# EAGLE board lightning-detector (EAGLE 5.07)
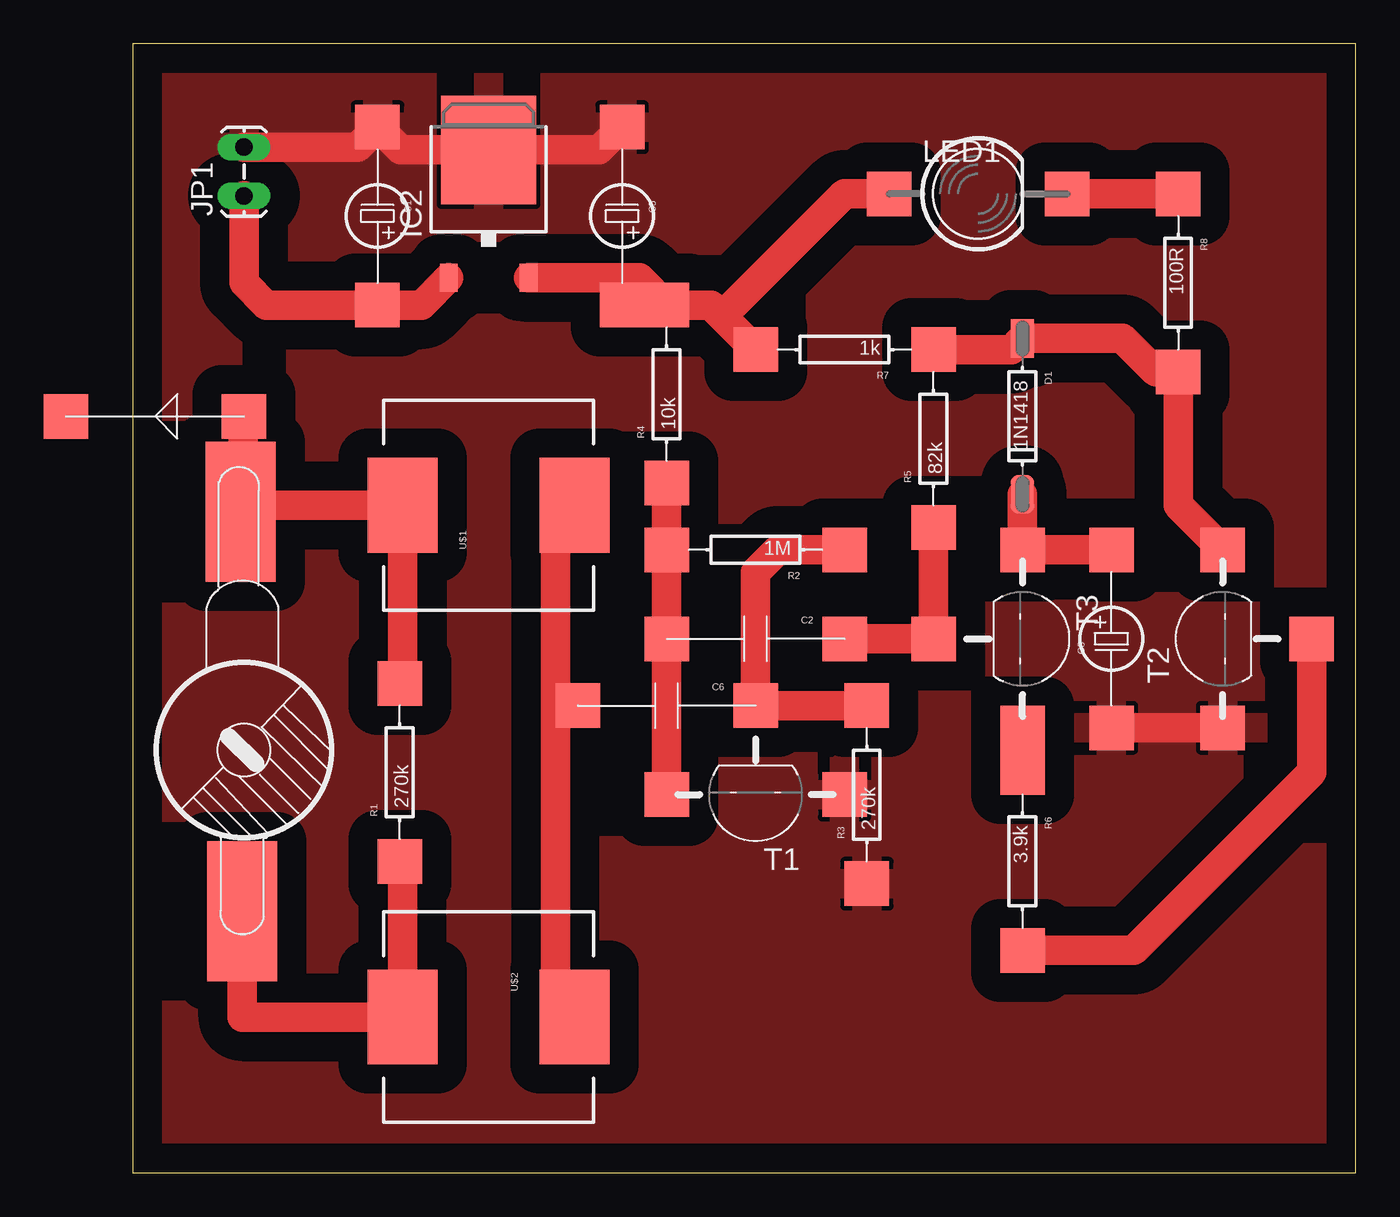
[diagram p0: board, top side]

Size 69.83 x 64.44 mm. Coordinates in mm from the lower left corner, seen from the top.
Outline: 0,0 69.83,0 69.83,64.44 0,64.44 0,0
Copper layers (1*16): Top 0.035mm / dielectric 1.5mm / Bottom 0.035mm
Design rules "default": minimum track width 10mil, minimum drill 24mil, track to track 8mil, track to pad 8mil, pad to pad 8mil, via to via 8mil, smd to smd 8mil, copper to edge 40mil, drill to drill 8mil, minimum pad ring 10mil, minimum via ring 8mil, stop-mask expansion 4mil, vias tented up to drill 0mil, thermal gap 10mil

## Footprints (pad centres in the part's own frame; a part is rotated, then mirrored left to right if it is on the bottom)
CPOL-SMD-10UF-25V = smd 2.54 x 2.54: + 5.08,0; - -5.08,0
CAP-SMD-SMALL = smd 2.54 x 2.54: P$1 5.08,0; P$2 -5.08,0
CERMIT-DIE-10MM = smd 8 x 4: P$1 -9.2,0.1; P$2 13.6,0.2
DIODE-IN4148-SMD = smd 2.184 x 1.321: A -4.445,0; C 4.445,0
TO252 = smd 1 x 1.6: 1 -2.28,-4.8; 2 2.28,-4.8 | smd 5.4 x 6.2: 3 0,2.5
1X02_LOCK_LONGPADS = drill 1.016 long: 1 -0.127,0; 2 2.667,0
LED-RF = smd 2.54 x 2.54: A -5.08,0; K 5.08,0
AXIAL-0.3-SMD = smd 2.54 x 2.54: P$1 -5.08,0; P$2 5.08,0
TO92-EBC-SMD = smd 2.54 x 2.54: B 0,-5.08; C 5.08,0; E -5.08,0
CDRH125 = smd 5.4 x 4: 1 0,4.9; 2 0,-4.9
ANT-WISP-2PAD = smd 2.54 x 2.54: P$3 -5.08,0; P$4 5.08,0

## Placement (x,y rotation side)
C1  10u  [CPOL-SMD-10UF-25V]  13.97,54.61 270 top
C2  [CAP-SMD-SMALL]  35.56,30.48 180 top
C3  10uF  [CPOL-SMD-10UF-25V]  55.88,30.48 90 top
C4  5-20p  [CERMIT-DIE-10MM]  6.35,24.13 90 top
C5  10u  [CPOL-SMD-10UF-25V]  27.94,54.61 270 top
C6  [CAP-SMD-SMALL]  30.48,26.67 180 top
D1  1N1418  [DIODE-IN4148-SMD]  50.8,43.18 270 top
IC2  7805DT  [TO252]  20.32,55.88 0 top
JP1  [1X02_LOCK_LONGPADS]  6.35,55.88 90 top
LED1  [LED-RF]  48.26,55.88 0 top
R1  270k  [AXIAL-0.3-SMD]  15.24,22.86 90 top
R2  1M  [AXIAL-0.3-SMD]  35.56,35.56 180 top
R3  270k  [AXIAL-0.3-SMD]  41.91,21.59 90 top
R4  10k  [AXIAL-0.3-SMD]  30.48,44.45 90 top
R5  82k  [AXIAL-0.3-SMD]  45.72,41.91 90 top
R6  3.9k  [AXIAL-0.3-SMD]  50.8,17.78 270 top
R7  1k  [AXIAL-0.3-SMD]  40.64,46.99 180 top
R8  100R  [AXIAL-0.3-SMD]  59.69,50.8 270 top
T1  9014  [TO92-EBC-SMD]  35.56,21.59 180 top
T2  9014  [TO92-EBC-SMD]  62.23,30.48 90 top
T3  9015  [TO92-EBC-SMD]  50.8,30.48 270 top
U$1  10mH  [CDRH125]  20.32,38.1 90 top
U$2  1mH  [CDRH125]  20.32,8.89 270 top
U$3  ANTENNA-WISP2  [ANT-WISP-2PAD]  1.27,43.18 0 top

## Library data of the parts
C1-C3 C5 C6 D1 JP1 LED1 R1-R8 T1-T3 U$1 U$2 = digital-toy
C4 U$3 = dtoy-RF
IC2 = linear

## Nets
+VIN: C1.+ IC2.1 JP1.1
GND: C1.- C3.- C5.- IC2.3 JP1.2 R3.P$1 T1.E T2.E
N$1: C6.P$2 R2.P$1 R3.P$2 T1.B
N$2: C4.P$2 R1.P$2 U$1.1 U$3.P$3 U$3.P$4
N$3: C6.P$1 U$1.2 U$2.1
N$4: C2.P$1 R2.P$2 R4.P$1 T1.C
N$5: C2.P$2 R5.P$1 T3.B
N$6: D1.A R5.P$2 R7.P$1 R8.P$2 T2.C
N$7: C3.+ D1.C T3.E
N$8: R6.P$1 T3.C
N$9: R6.P$2 T2.B
N$12: LED1.K R8.P$1
N$13: C4.P$1 R1.P$1 U$2.2
VCC: C5.+ IC2.2 LED1.A R4.P$2 R7.P$2

## Tracks (layer width: path | path; a pad name or v marks a point on that pad's centre or on a via)
+VIN
  Top 1.676: JP1.1 6.35,50.8 7.62,49.53 C1.+ 16.49,49.53 IC2.1
GND
  Top 1.676: C3.- T2.E | JP1.2 12.83,58.55 C1.- 15.28,58.38 IC2.3 26.63,58.38 C5.-
  pour Top (isolate 1.676): -5.08,68.58 74.93,68.58 85.09,58.42 85.09,10.16 69.85,-5.08 -3.81,-5.08 -10.16,1.27 -10.16,63.5
N$1
  Top 1.676: R2.P$1 36.83,35.56 35.56,34.29 C6.P$2 R3.P$2
N$2  (1 unrouted)
  Top 1.676: U$3.P$4 C4.P$2 6.35,38.1 U$1.1 15.42,28.12 R1.P$2
N$3
  Top 1.676: U$1.2 24.13,38.1 24.13,26.67 | 24.13,26.67 C6.P$1 | 24.13,26.67 24.13,8.89 U$2.1
N$4
  Top 1.676: T1.C C2.P$1 R2.P$2 R4.P$1
N$5
  Top 1.676: C2.P$2 T3.B R5.P$1
N$6
  Top 1.676: T2.C 59.69,38.1 R8.P$2 58.42,45.72 56.52,47.62 D1.A 50.16,46.99 R7.P$1
N$7
  Top 1.676: C3.+ T3.E D1.C
N$8
  Top 1.676: R6.P$1 T3.C
N$9
  Top 1.676: R6.P$2 57.15,12.7 67.31,22.86 T2.B
N$12
  Top 1.676: LED1.K R8.P$1
N$13
  Top 1.676: C4.P$1 6.25,8.89 U$2.2 15.42,17.78 R1.P$1
VCC
  Top 1.676: IC2.2 27.94,51.08 | 27.94,51.08 28.93,51.08 R4.P$2 33.02,49.53 33.66,48.9 | 33.66,48.9 R7.P$2 | LED1.A 40.64,55.88 33.66,48.9 | 27.94,51.08 C5.+